# EAGLE board Voltage_Feedback v3 (EAGLE 9.7.0)
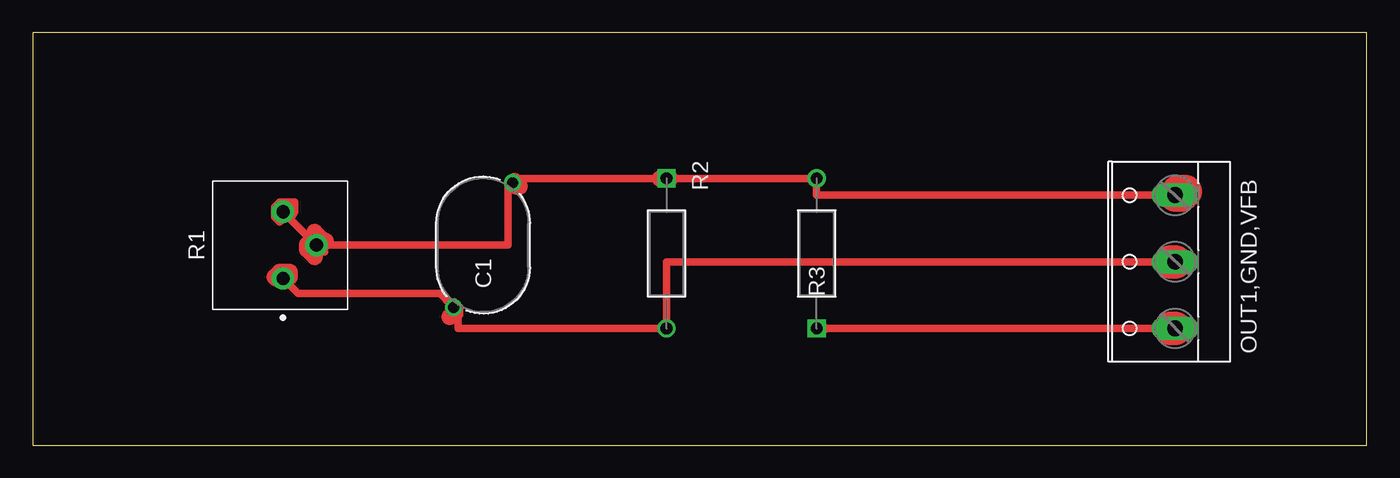
[diagram p0: board, top side]

Size 101.58 x 31.42 mm. Coordinates in mm from the lower left corner, seen from the top.
Outline: 0,0 101.58,0 101.58,31.42 0,31.42 0,0
Copper layers (1*16): Top 0.035mm / dielectric 1.5mm / Bottom 0.035mm
Design rules "Fusion Electronics Design Rules": minimum track width 22mil, minimum drill 0.35mm, track to track 14mil, track to pad 6mil, pad to pad 6mil, via to via 6mil, smd to smd 6mil, copper to edge 40mil, drill to drill 6mil, minimum pad ring 10mil, minimum via ring 8mil, stop-mask expansion 4mil, vias tented up to drill 9999mil, thermal gap 10mil

## Footprints (pad centres in the part's own frame; a part is rotated, then mirrored left to right if it is on the bottom)
CAP_60GAD10_VIS = drill 0.813 pad 1.321: 1 -4.75,2.25; 2 4.75,-2.25
W237-133 = drill 1.194 long: 1 -5.08,-0.635; 2 0,-0.635; 3 5.08,-0.635
PV36P = drill 1 pad 1.7: 1 0,0; 2 2.54,-2.54; 3 5.08,0
STA_CF14_STP = drill 0.889 pad 1.397 square: 1 0,0 | drill 0.889 pad 1.397: 2 11.43,0

## Placement (x,y rotation side)
C1  564R60GAD10CAP_60GAD10_VIS  [CAP_60GAD10_VIS]  34.29,15.24 90 top
OUT1,GND,VFB  [W237-133]  86.36,13.97 90 top
R1  [PV36P]  19.05,12.7 90 top
R2  CF14JT10K0STA_CF14_STP  [STA_CF14_STP]  48.26,20.32 270 top
R3  CF14JT10K0STA_CF14_STP  [STA_CF14_STP]  59.69,8.89 90 top

## Library data of the parts
C1 = 2024-12-05_10-34-19_Library; COPYRIGHT: Copyright (C) 2024 Ultra Librarian. All rights reserved.; MANUFACTURER_PART_NUMBER: 564R60GAD10; MFR_NAME: Vishay
OUT1,GND,VFB = con-wago-508
R1 = Resistor; CATEGORY: Resistor; DESCRIPTION: Lead Sealed Type Multiturn PV36 Series; MANUFACTURER: BOURNS; MPN: PV36P; OPERATING_TEMPERATURE: -55 to +125 °C; PART_STATUS: Active; ROHS_COMPLIANCE: RoHS Compliant; SERIES: PV36; SUB-CATEGORY: Trimpot; TYPE: Lead Sealed
R2 R3 = 2024-12-04_14-13-54_Library; COPYRIGHT: Copyright (C) 2024 Ultra Librarian. All rights reserved.; MANUFACTURER_PART_NUMBER: CF14JT10K0; MFR_NAME: Stackpole International

## Nets
N$1: OUT1,GND,VFB.1 R3.1
N$2: C1.2 OUT1,GND,VFB.3 R1.2 R1.3 R2.1 R3.2
N$3: C1.1 OUT1,GND,VFB.2 R1.1 R2.2

## Tracks (layer width: path | path; a pad name or v marks a point on that pad's centre or on a via)
N$1
  Top 0.559: 86.61,8.89 59.94,8.89
  Top 1.27: R3.1 59.94,8.89
  Top 2.54: OUT1,GND,VFB.1 86.61,8.89
N$2
  Top 0.559: 47.75,20.32 36.83,20.32 36.67,20.14 | 59.56,20.32 48.51,20.32 | OUT1,GND,VFB.3 59.69,19.05 R3.2 | C1.2 36.2,19.68 36.2,15.24 22.61,15.24 22.29,15.56 | 19.56,17.78 19.94,17.78 19.94,18.54 18.8,18.54 18.41,18.16 18.41,17.4 18.8,17.02 19.05,17.27 R1.3 21.21,15.62 20.89,15.3 | 21.46,14.35 21.59,14.48 21.59,14.73 22.1,14.73 | 21.78,15.05 22.1,14.73 | 22.1,14.73 22.23,14.73
  Top 1.27: C1.2 36.85,19.68 37.08,19.68 37.08,19.73 36.67,20.14 | R1.3 19.56,17.78 | 21.46,14.35 20.89,14.92 20.89,15.3 | 21.78,15.05 R1.2 21.46,15.37 21.46,16.26 21.97,15.75 21.97,15.24 22.29,15.56 | 47.75,20.32 R2.1 48.51,20.32 | R3.2 59.56,20.32
  Top 2.54: OUT1,GND,VFB.3 87.25,19.3 87.76,19.3 87.5,19.05 OUT1,GND,VFB.3
N$3
  Top 0.559: 19.24,12.51 20.19,11.56 31.02,11.56 31.87,10.67 32.04,10.84 | 48.13,8.89 32.38,8.89 32.38,9.78 32.51,9.91 32.51,10.54 32.46,10.49 C1.1 32.04,10.84 | 86.61,13.97 48.26,13.97 R2.2 | 32.04,10.84 32.12,10.92
  Top 1.27: C1.1 32.04,10.07 31.75,9.78 | R1.1 18.54,12.7 18.41,12.83 18.8,13.21 19.56,13.21 19.56,12.83 19.24,12.51 | R2.2 48.13,8.89
  Top 2.54: OUT1,GND,VFB.2 86.61,13.97